# Altium PCB XY-V17B封装图.PcbDoc
Units mil, origin at the board's own origin, x right, y up, seen from the top; angles counter-clockwise.
Board outline 6000 x 4000 mil, 2 copper layers (Top Layer, Bottom Layer); 1 components, 0 nets, 36 pads, 0 vias.
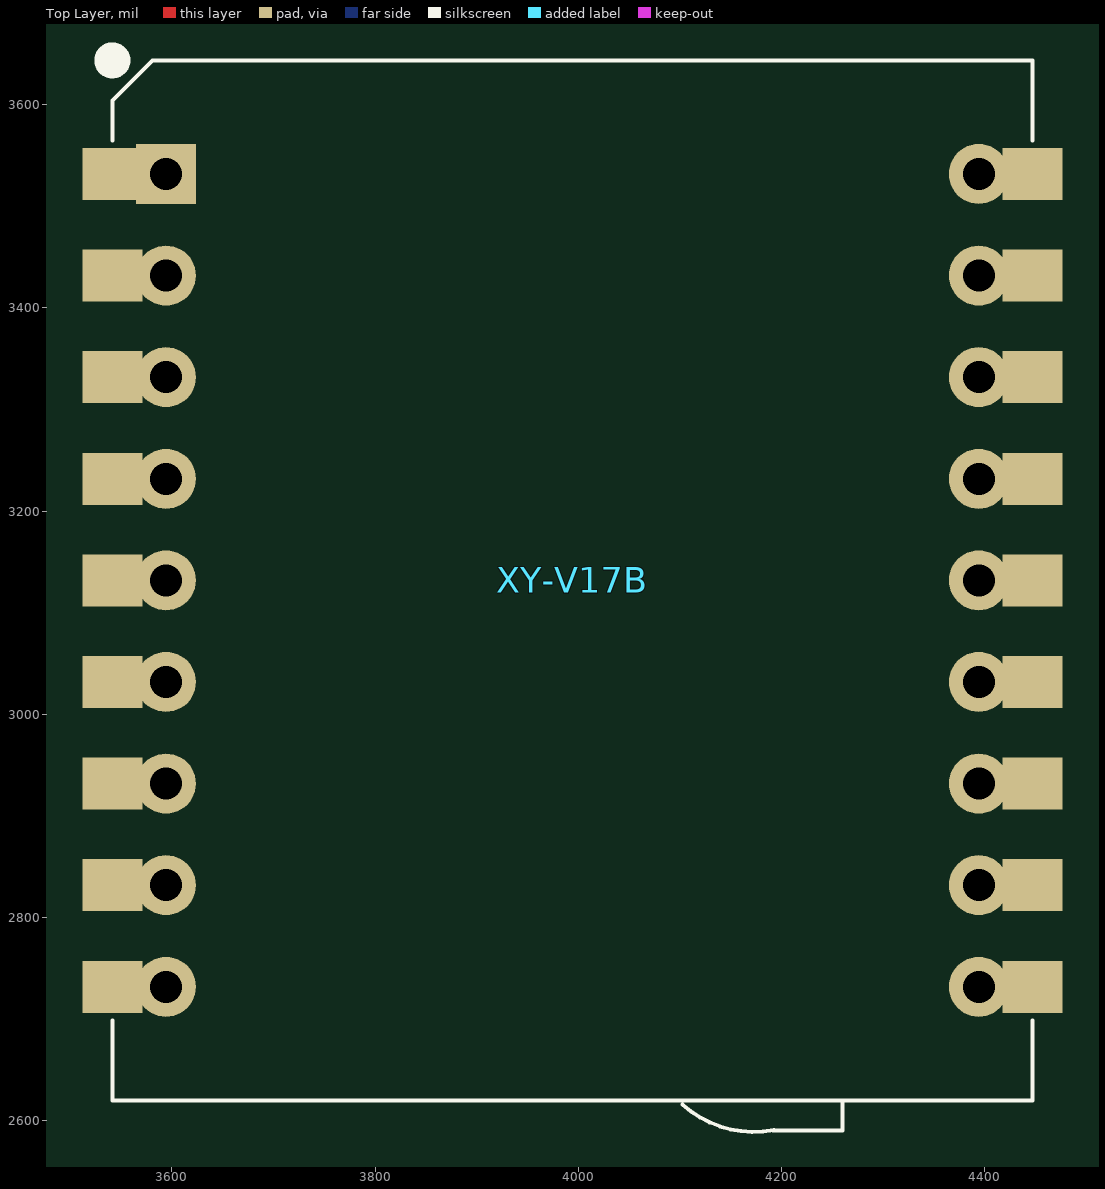
[diagram p0: Top Layer view]
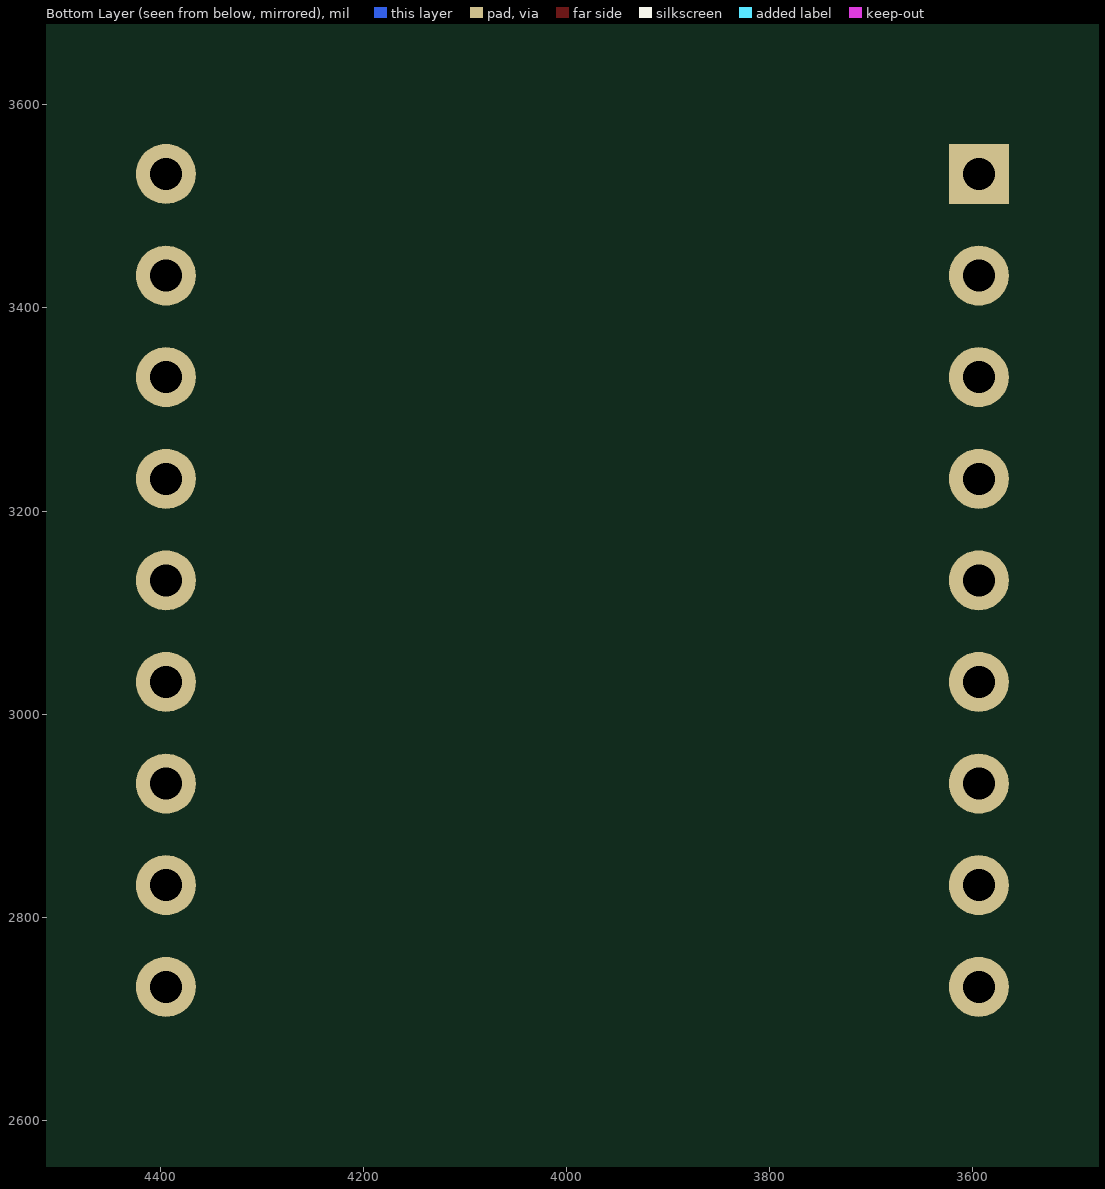
[diagram p1: Bottom Layer view, seen from below]

## Layer stack, top to bottom
Top Layer: signal copper 1.4
Dielectric: dielectric 12.6, FR-4, Dk 4.8
Bottom Layer: signal copper 1.4

## Board outline
1000,1000 7000,1000 7000,5000 1000,5000

## Design rules (kind name [scope] priority, off if disabled: settings)
Clearance [All] p1: gap=10
PolygonConnect [All] p1: connectstyle=Relief reliefconductorwidth=10 reliefentries=4 polygonreliefangle="90 Angle"
RoutingVias [All] p1: holewidth=28 width=50 viastyle="Through Hole" minholewidth=28 minwidth=50 maxholewidth=28 maxwidth=50
SilkscreenOverComponentPads [All] p1: minsilkscreentomaskgap=10
SolderMaskExpansion [All] p1: expansion=4
TestPointUsage [All] p1: valid=0 allowmultiple=FALSE
Testpoint [All] p1: side=15 testpointundercomponent=TRUE minsize=40 maxsize=100 preferedsize=60 minholesize=0 maxholesize=40 preferedholesize=32 testpointgrid=1 style=1023 order=0123456789
Width [All] p1: maxlimit=10 minlimit=10 preferedwidth=10
23 further rules are at their usual default settings.

## Components (designator, comment, footprint, x,y, rotation, side; value= is the part's Value field where it differs from the comment)
XY-V17B "Comment" SV1700A 4260,2620 r0 top

## Footprints (in the part's own frame and the unit in brackets; to place one, negate y for a bottom-side part, rotate by r counter-clockwise, add the part's x,y. Pads: shape width x height; smd on the part's side, far side on the other; paste and mask are expansions set on the pad)
SV1700A [mm]
  rect 1.5x1.3 smd: 1(-18.25,23.16) 2(-18.25,20.62) 3(-18.25,18.08) 4(-18.25,15.54) 5(-18.25,13) 6(-18.25,10.46) 7(-18.25,7.92) 8(-18.25,5.38) 9(-18.25,2.84) 10(4.75,2.84) 11(4.75,5.38) 12(4.75,7.92) 13(4.75,10.46) 14(4.75,13) 15(4.75,15.54) 16(4.75,18.08) 17(4.75,20.62) 18(4.75,23.16)
  rect 1.5x1.5 hole 0.8: 1(-16.91,23.16)
  round 1.5 hole 0.8: 2(-16.91,20.62) 3(-16.91,18.08) 4(-16.91,15.54) 5(-16.91,13) 6(-16.91,10.46) 7(-16.91,7.92) 8(-16.91,5.38) 9(-16.91,2.84) 10(3.41,2.84) 11(3.41,5.38) 12(3.41,7.92) 13(3.41,10.46) 14(3.41,13) 15(3.41,15.54) 16(3.41,18.08) 17(3.41,20.62) 18(3.41,23.16)
  silkscreen extent -18.45,-0.79 4.75,26.2

## Nets (pads, with @x,y where several pads share a name; then routed paths per layer and width w, separated by ;. In a path a pad name is that pad's centre, name@x,y a point inside that pad or via, vN(x,y) a via of type N, cw(c..) or ccw(c..) an arc to the next point about the centre after c; other vN are vias at no path point)
pads on no net: XY-V17B.1 XY-V17B.2 XY-V17B.3 XY-V17B.4 XY-V17B.5 XY-V17B.6 XY-V17B.7 XY-V17B.8 XY-V17B.9 XY-V17B.10 XY-V17B.11 XY-V17B.12 XY-V17B.13 XY-V17B.14 XY-V17B.15 XY-V17B.16 XY-V17B.17 XY-V17B.18